# Altium PCB USB-C_Explorer.PcbDoc
Units mil, origin at the board's own origin, x right, y up, seen from the top; angles counter-clockwise.
Board outline 1725 x 1460 mil, 2 copper layers (Top Layer, Bottom Layer); 59 components, 39 nets, 240 pads, 140 vias.
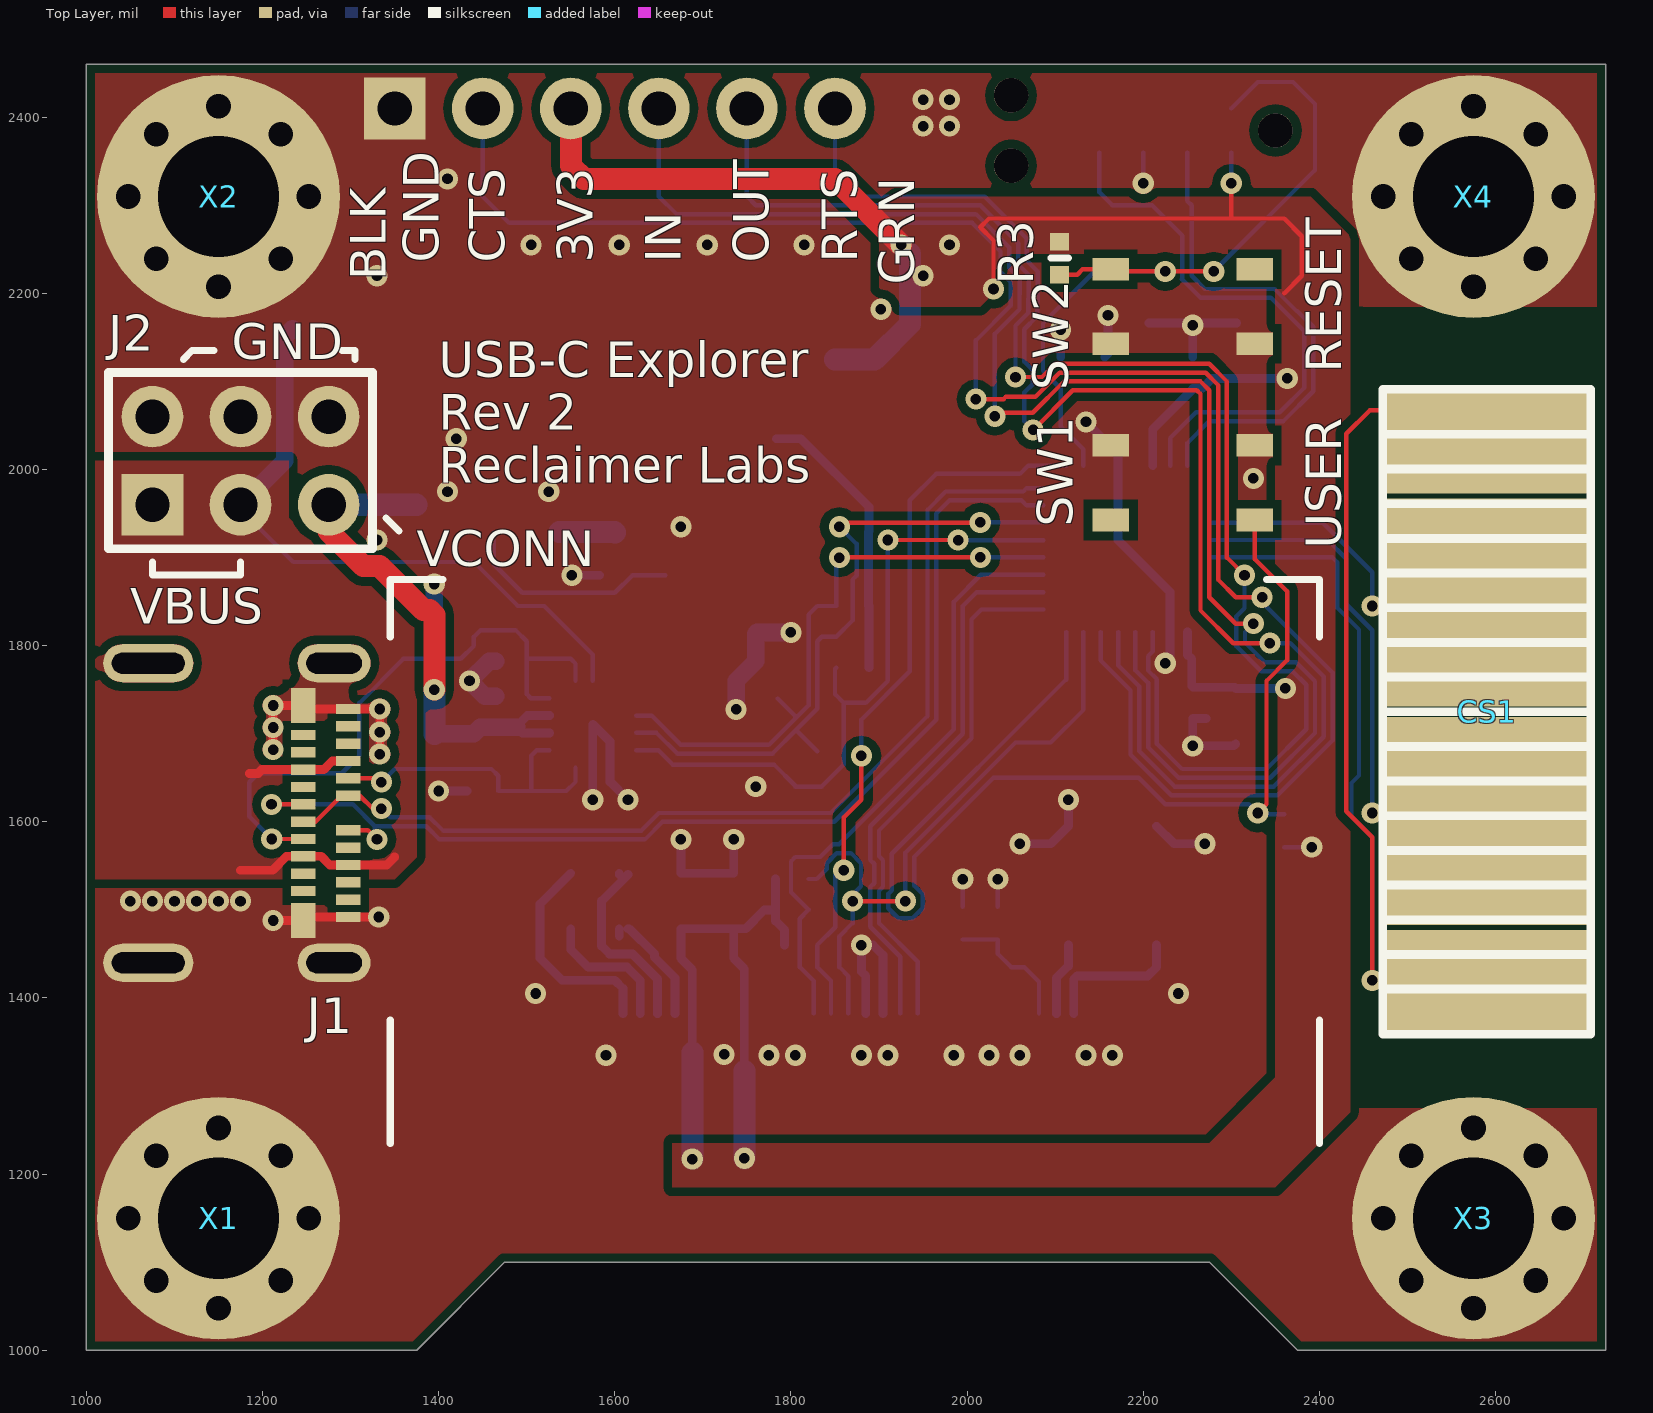
[diagram p0: Top Layer view]
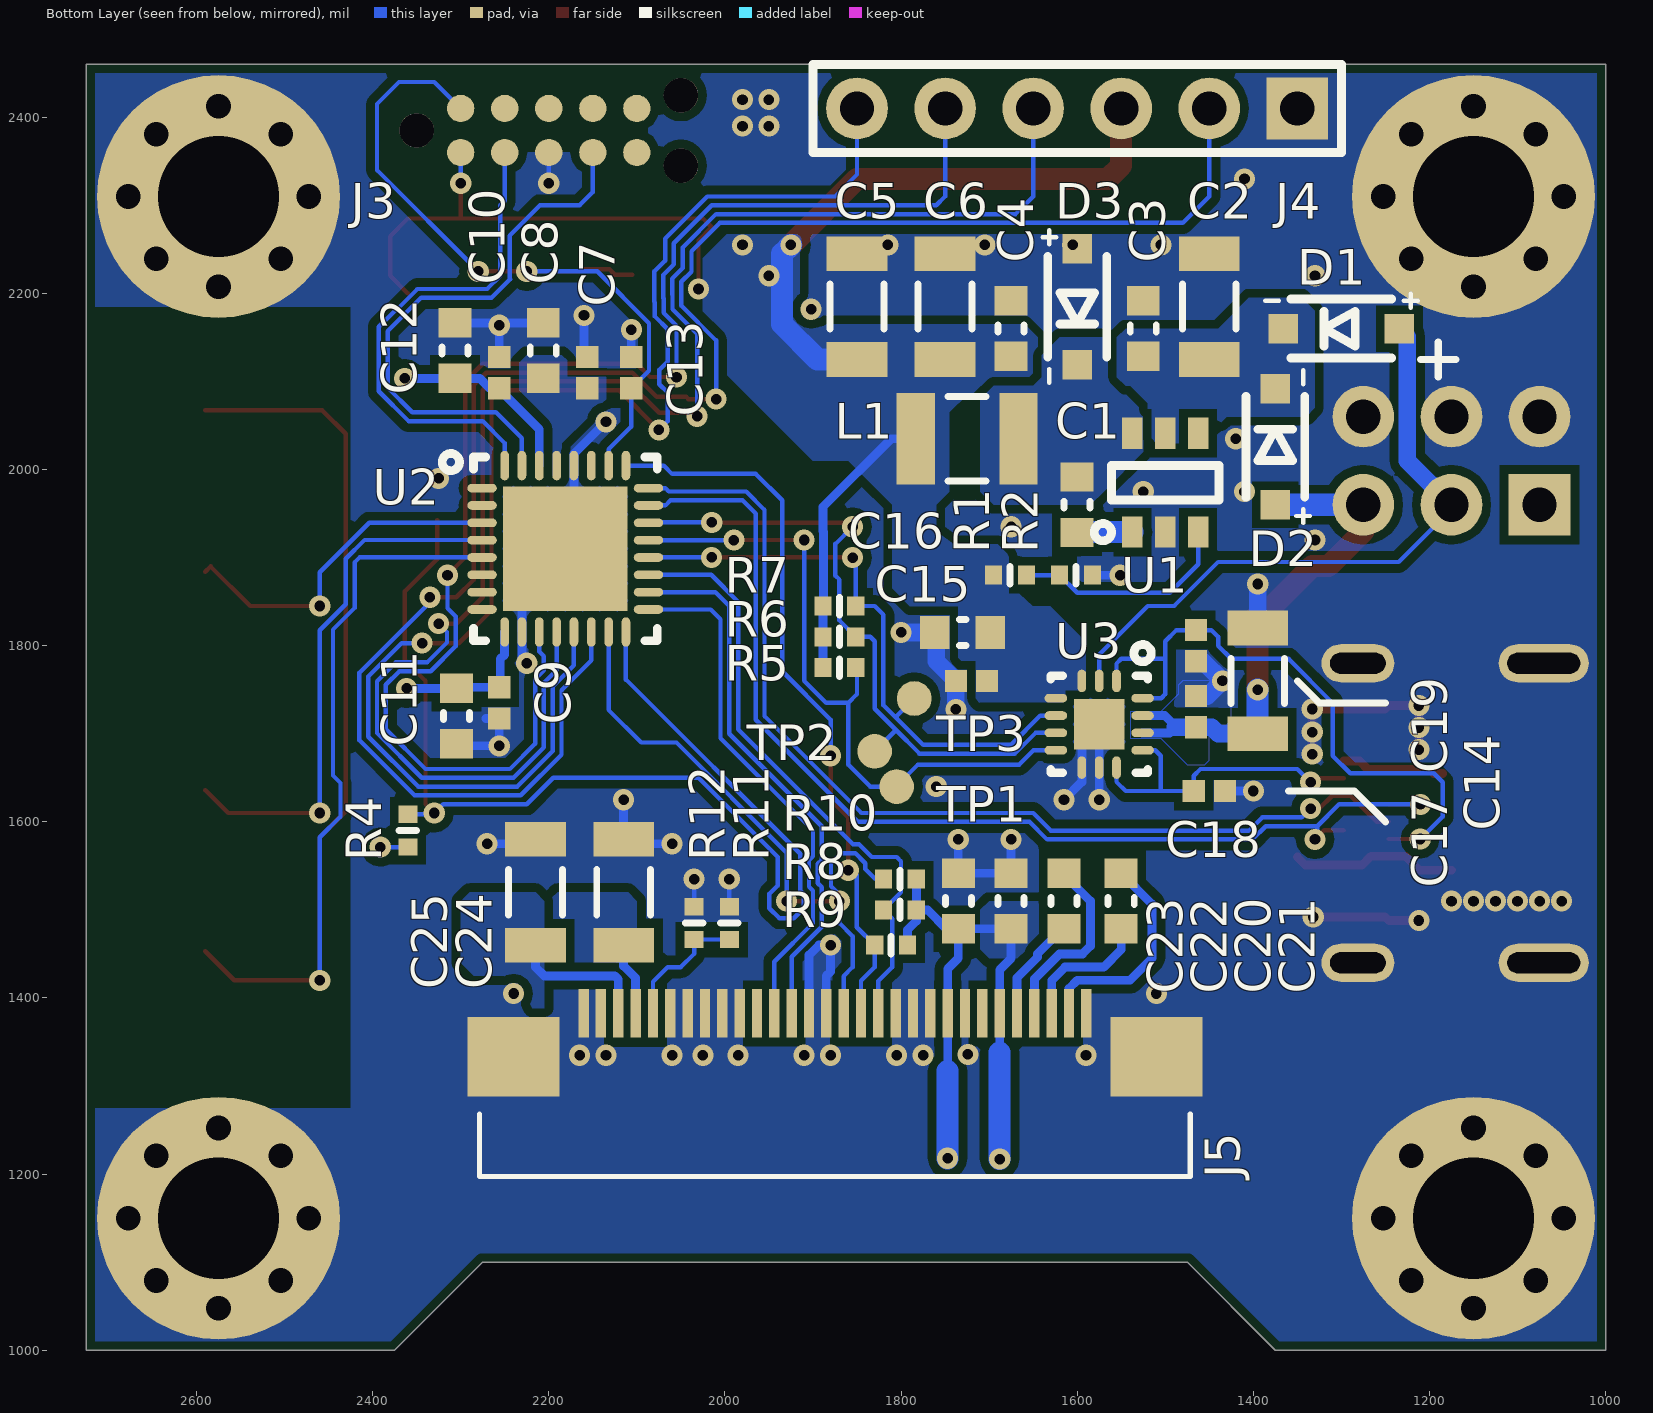
[diagram p1: Bottom Layer view, seen from below]
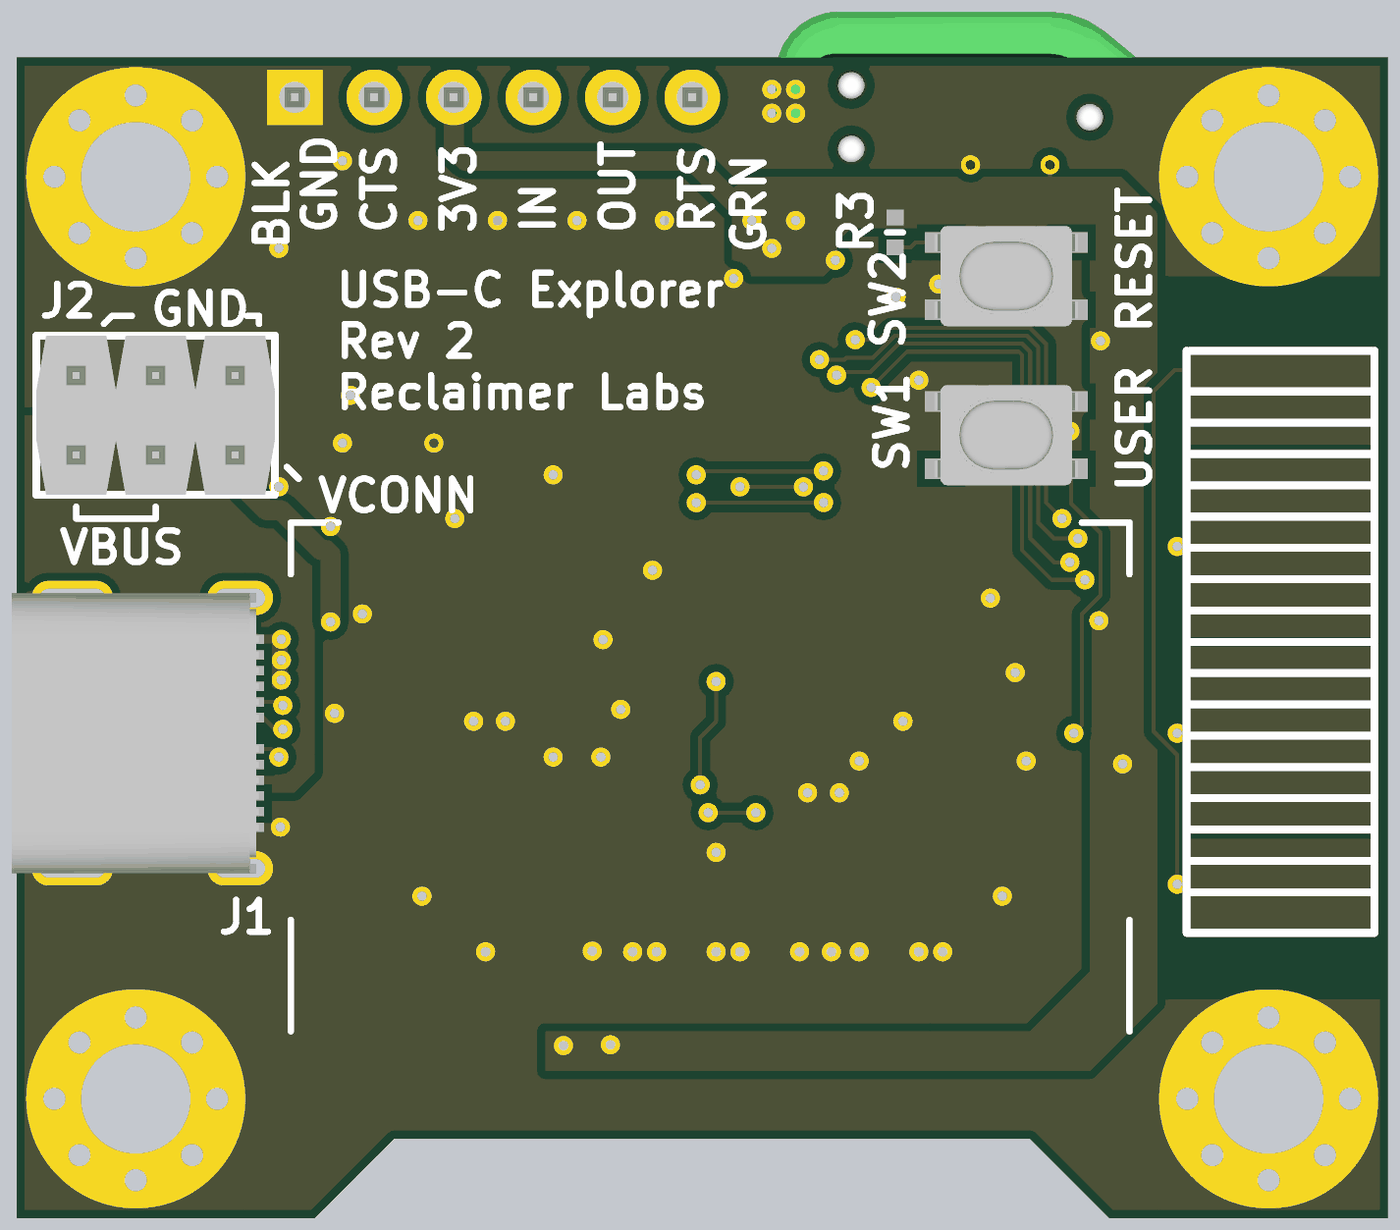
[diagram p2: 3D render of the assembled board from above, using the file's embedded part models]

## Layer stack, top to bottom
Top Solder: solder mask 0.4, Solder Resist, Dk 3.5
Top Layer: signal copper 1.4
Dielectric 1: dielectric 12.6, FR-4, Dk 4.8
Bottom Layer: signal copper 1.4
Bottom Solder: solder mask 0.4, Solder Resist, Dk 3.5

## Board outline
1000,1000 1000,2460 2725,2460 2725,1000 2375,1000 2275,1100 1475,1100 1375,1000

## Design rules (kind name [scope] priority, off if disabled: settings)
BoardOutlineClearance [All] p1: gap=10 ignorepadtopadclearanceinfootprint=FALSE
Clearance [All] p1: gap=5 ignorepadtopadclearanceinfootprint=FALSE except(10: Arc-Fill Arc-Poly Arc-Region Track-Fill Track-Poly Track-Region SMDPad-Fill SMDPad-Poly SMDPad-Region THPad-Fill THPad-Poly THPad-Region Via-Fill Via-Poly Via-Region Fill-Fill Fill-Poly Fill-Region Poly-Poly Poly-Region Region-Region)
DiffPairsRouting [All] p1: maxlimit=10 minlimit=5 mostfreqgap=5 toplayer_minwidth=5 toplayer_maxwidth=15 toplayer_prefwidth=5 bottomlayer_minwidth=5 bottomlayer_maxwidth=15 bottomlayer_prefwidth=5 maxuncoupledlength=500
Height [All] p1: minheight=0 maxheight=1200 prefheight=500
HoleSize [All] p1: absolutevalues=TRUE maxlimit=250 minlimit=12 maxpercent=80.000 minpercent=20.000
MinimumAnnularRing [All] p1: minimumring=6
MinimumSolderMaskSliver [All] p1: minsoldermaskwidth=3.94
PlaneConnect PlaneConnect_GND [InNet('GND')] p1: planeconnectstyle=Relief reliefexpansion=20 reliefentries=4 reliefconductorwidth=10 reliefairgap=10
PolygonConnect [All] p1: connectstyle=Direct reliefconductorwidth=10 reliefentries=4 polygonreliefangle="90 Angle" airgapwidth=10
RoutingVias [All] p1: holewidth=12 width=24 viastyle="Through Hole" minholewidth=12 minwidth=24 maxholewidth=24 maxwidth=48
SilkToSilkClearance [All] p1: silktosilkclearance=0
SilkToSolderMaskClearance [IsPad] p1: minsilkscreentomaskgap=0 clearancetoexposedcopper=TRUE
SolderMaskExpansion SolderMaskExpansion_Via [not IsVia] p1: expansion=1.97
SolderMaskExpansion SolderMaskExpansion_notVia [IsVia] p2: expansion=-100
Width [All] p1: maxlimit=100 minlimit=5 preferedwidth=5
23 further rules are at their usual default settings.

## Classes and differential pairs
component class USB-C: C1 C2 C3 C4 C5 C6 D1 D2 D3 J1 J2 L1 R1 R2 U1 U5 X1 X2 X3 X4
component class MCU: C7 C8 C9 C10 C11 C12 C13 C14 C15 C16 C17 C18 C19 CS1 J3 J4 R3 R4 R5 R6 R7 SW1 SW2 TP1 TP2 TP3 U2 U3
component class Display: C20 C21 C22 C23 C24 C25 J5 R8 R9 R10 R11 R12
differential pair USB: +USB_P -USB_N

## Components (designator, comment, footprint, x,y, rotation, side; value= is the part's Value field where it differs from the comment)
C1 "MF-CAP-0603-0.01uF" C0603 1600,1960 r90 bottom value=0.01uF
C2 "CL31B106KBHNNNE" C1206 1450,2185 r90 bottom value=10uF
C3 "MF-CAP-0603-1uF" C0603 1525,2160 r90 bottom value=1uF
C4 "MF-CAP-0603-1uF" C0603 1675,2160 r90 bottom value=1uF
C5 "MF-CAP-1206-10uF" C1206 1850,2185 r90 bottom value=10uF
C6 "MF-CAP-1206-10uF" C1206 1750,2185 r90 bottom value=10uF
C7 "MF-CAP-0402-0.1uF" C0402 2156.26,2110 r90 bottom value=0.1uF
C8 "MF-CAP-0603-1uF" C0603 2206.26,2135 r90 bottom value=1uF
C9 "MF-CAP-0402-0.1uF" C0402 2256.26,1735 r270 bottom value=0.1uF
C10 "MF-CAP-0402-0.1uF" C0402 2256.26,2110 r90 bottom value=0.1uF
C11 "MF-CAP-0603-1uF" C0603 2305,1720 r270 bottom value=1uF
C12 "MF-CAP-0603-1uF" C0603 2306.26,2135 r90 bottom value=1uF
C13 "MF-CAP-0402-0.1uF" C0402 2106.26,2110 r90 bottom value=0.1uF
C14 "MF-CAP-1206-10uF" C1206 1395,1760 r90 bottom value=10uF
C15 "MF-CAP-0402-0.1uF" C0402 1720,1760 r0 bottom value=0.1uF
C16 "MF-CAP-0603-1uF" C0603 1730,1815 r0 bottom value=1uF
C17 "MF-CAP-0402-0.1uF" C0402 1465,1725 r90 bottom value=0.1uF
C18 "CL05B471KB5NNNC" C0402 1450,1635 r180 bottom value=470pF
C19 "CL05B471KB5NNNC" C0402 1465,1800 r270 bottom value=470pF
C20 "MF-CAP-0603-1uF" C0603 1615,1510 r270 bottom value=1uF
C21 "MF-CAP-0603-1uF" C0603 1550,1510 r270 bottom value=1uF
C22 "MF-CAP-0603-1uF" C0603 1675,1510 r90 bottom value=1uF
C23 "MF-CAP-0603-1uF" C0603 1735,1510 r90 bottom value=1uF
C24 "MF-CAP-1206-10uF" C1206 2115,1520 r90 bottom value=10uF
C25 "MF-CAP-1206-10uF" C1206 2215,1520 r90 bottom value=10uF
CS1 "SLIDER" QTOUCH_SLIDER_19x6mm 2590,1725 r0 top
D1 "MF-DIO-SOD123-BAT42" SOD-123 1300,2160 r180 bottom value=BAT42
D2 "MF-DIO-SOD123-BAT42" SOD-123 1375,2025.94 r270 bottom value=BAT42
D3 "MF-DIO-SOD123-BAT42" SOD-123 1600,2185 r90 bottom value=BAT42
J1 "1054500101" 1054500101 1149,1610 r270 top
J2 "MF-CON-2.54mm-2x3" CONN_HEADER_02x03_2mm54_Straight 1175,2010 r0 top value="HDR 02x03 2mm54 Straight"
J3 "DNP" TC2050-IDC-NL 2200,2385 r180 bottom value=TDC2050-IDC
J4 "DNP" CONN_HEADER_01x06_2mm54_Straight 1600,2410 r0 bottom value=Serial
J5 "SFV30R-3STBE1HLF" SFV30R_Mirrored 1875,1280 r0 bottom value=ER-OLED0.96-1
L1 "MF-IND-1210-10uH" L1210 1725,2035 r0 bottom value=10uH
R1 "MF-RES-0402-680K" R0402 1676.3,1880 r180 bottom value=680k
R2 "MF-RES-0402-220K" R0402 1601.3,1880 r180 bottom value=220k
R3 "MF-RES-0402-10K" R0402 2105,2240 r270 top value=10k
R4 "MF-RES-0402-10K" R0402 2360,1590 r90 bottom value=10k
R5 "MF-RES-0402-2K" R0402 1870,1775 r180 bottom value=2k
R6 "MF-RES-0402-2K" R0402 1870,1810 r180 bottom value=2k
R7 "MF-RES-0402-10K" R0402 1870,1845 r180 bottom value=10k
R8 "MF-RES-0402-10K" R0402 1801.3,1500 r0 bottom value=10k
R9 "MF-RES-0402-10K" R0402 1811.3,1460 r0 bottom value=10k
R10 "MF-RES-0402-10K" R0402 1801.3,1535 r0 bottom value=10k
R11 "MF-RES-0402-750K" R0402 1995,1485 r90 bottom value=750k
R12 "MF-RES-0402-750K" R0402 2035,1485 r90 bottom value=750k
SW1 "MF-SW-TACT-4.2MM" TACT_4.2MM 2245,1985 r180 top value="Push Button"
SW2 "MF-SW-TACT-4.2MM" TACT_4.2MM 2245,2185 r0 top value="Push Button"
TP1 "TESTPOINT" TP_1mm 1805,1640 r90 bottom
TP2 "TESTPOINT" TP_1mm 1830,1680 r90 bottom
TP3 "TESTPOINT" TP_1mm 1785,1740 r90 bottom
U1 "RT8258GJ6" SOT23-6 1500,1985 r90 bottom
U2 "ATSAMD21E17A-MU" QFN32EP 2181.26,1910 r180 bottom value=ATSAMD21E
U3 "FUSB302BMPX" MLP14 1575,1710.79 r270 bottom
X1 "MTHOLE" MTHOLE_M3 1150,1150 r0 top
X2 "MTHOLE" MTHOLE_M3 1150,2310 r0 top
X3 "MTHOLE" MTHOLE_M3 2575,1150 r0 top
X4 "MTHOLE" MTHOLE_M3 2575,2310 r0 top

## Footprints (in the part's own frame and the unit in brackets; to place one, negate y for a bottom-side part, rotate by r counter-clockwise, add the part's x,y. Pads: shape width x height; smd on the part's side, far side on the other; paste and mask are expansions set on the pad)
1054500101 [mm]
  rect 0.3x0.7 smd: A1(-3,3.77) A2(-2.5,3.77) A3(-2,3.77) A4(-1.5,3.77) A5(-1,3.77) A6(-0.5,3.77) A7(0.5,3.77) A8(1,3.77) A9(1.5,3.77) A10(2,3.77) A11(2.5,3.77) A12(3,3.77) B2(2.25,2.47) B3(1.75,2.47) B4(1.25,2.47) B5(0.75,2.47) B6(0.25,2.47) B7(-0.25,2.47) B8(-0.75,2.47) B9(-1.25,2.47) B10(-1.75,2.47) B11(-2.25,2.47)
  rect 1x0.7 smd: B1(3.1,2.47) B12(-3.1,2.47)
  oval 1.1x2.1 hole 0.6 slot 1.6 at 90 deg: S1(-4.32,3.36) S2(4.32,3.36)
  oval 1.1x2.6 hole 0.6 slot 2.1 at 90 deg: S3(-4.32,-2) S4(4.32,-2)
  body extent -4.47,-3.94 4.47,3.96, height 3.16
C0402 [mm]
  rect 0.64x0.64 smd: 1(-0.45,0) 2(0.45,0)
  body extent -0.5,-0.25 0.5,0.25, height 0.55
C0603 [mm]
  rect 0.85x0.95 smd: 1(-0.8,0) 2(0.8,0)
  silkscreen extent -0.1,-0.38 0.1,0.38, body extent -0.8,-0.4 0.8,0.4, height 0.85
C1206 [mm]
  rect 1x1.75 smd: 1(-1.525,0) 2(1.525,0)
  silkscreen extent -0.65,-0.77 0.65,0.77, body extent -1.6,-0.8 1.6,0.8, height 1.6
CONN_HEADER_01x06_2mm54_Straight [mil]
  rect 70x70 hole 39: 1(-250,0)
  round 70 hole 39: 2(-150,0) 3(-50,0) 4(50,0) 5(150,0) 6(250,0)
  silkscreen extent -300,-50 300,50, body extent -300,-49 300,49, height 364
CONN_HEADER_02x03_2mm54_Straight [mil]
  rect 70x70 hole 39: 1(-100,-50)
  round 70 hole 39: 2(-100,50) 3(0,-50) 4(0,50) 5(100,-50) 6(100,50)
  silkscreen extent -150,-100 150,100, body extent -150,-100 150,100, height 364
L1210 [mm]
  rect 1.1x2.64 smd: 1(-1.48,0) 2(1.48,0)
  silkscreen extent -0.55,-1.22 0.55,1.22, body extent -1.6,-1.25 1.6,1.25, height 2.5
MLP14 [mm] "MLP, 14-Leads, Body 2.50x2.50mm, Pitch 0.50mm, Thermal Pad 1.45x1.45mm, IPC Medium Density"
  oval 0.65x0.25 smd: 1(-1.25,0.5) 2(-1.25,0) 3(-1.25,-0.5) 8(1.25,-0.5) 9(1.25,0) 10(1.25,0.5)
  oval 0.25x0.65 smd: 4(-0.75,-1.25) 5(-0.25,-1.25) 6(0.25,-1.25) 7(0.75,-1.25) 11(0.75,1.25) 12(0.25,1.25) 13(-0.25,1.25) 14(-0.75,1.25)
  rect 1.45x1.45 smd: 15(0,0)
  silkscreen extent -2.3,-1.4 1.4,1.5, body extent -1.25,-1.25 1.25,1.25, height 0.8
MTHOLE_M3 [mm]
  round 7 hole 3.5: 1(0,0)
QFN32EP [mm] "QFN, 32-Leads, Body 5.00x5.00mm, Pitch 0.50mm, Thermal Pad 3.60x3.60mm, IPC Medium Density"
  oval 0.85x0.25 smd: 1(-2.4,1.75) 2(-2.4,1.25) 3(-2.4,0.75) 4(-2.4,0.25) 5(-2.4,-0.25) 6(-2.4,-0.75) 7(-2.4,-1.25) 8(-2.4,-1.75) 17(2.4,-1.75) 18(2.4,-1.25) 19(2.4,-0.75) 20(2.4,-0.25) 21(2.4,0.25) 22(2.4,0.75) 23(2.4,1.25) 24(2.4,1.75)
  oval 0.25x0.85 smd: 9(-1.75,-2.4) 10(-1.25,-2.4) 11(-0.75,-2.4) 12(-0.25,-2.4) 13(0.25,-2.4) 14(0.75,-2.4) 15(1.25,-2.4) 16(1.75,-2.4) 25(1.75,2.4) 26(1.25,2.4) 27(0.75,2.4) 28(0.25,2.4) 29(-0.25,2.4) 30(-0.75,2.4) 31(-1.25,2.4) 32(-1.75,2.4)
  rect 3.6x3.6 smd: 33(0,0)
  silkscreen extent -3.55,-2.65 2.65,2.75, body extent -2.5,-2.5 2.5,2.5, height 1
QTOUCH_SLIDER_19x6mm [mm] "QTOUCH_SLIDER_19x6mm"
  rect 6x6 smd paste-100: 1(0,3.15) 2(0,-3.15)
  rect 6x3 smd paste-100: 3(0,-7.8) 3(0,7.8)
  silkscreen extent -3,-9.3 3,9.3
R0402 [mm]
  rect 0.5x0.55 smd: 1(-0.475,0) 2(0.475,0)
  silkscreen extent 0,-0.25 0,0.25, body extent -0.5,-0.25 0.5,0.25, height 0.35
SFV30R_Mirrored [mm] "30-pin FPC connector"
  rect 0.3x1.4 smd: 1(-7.25,-2.6) 2(-6.75,-2.6) 3(-6.25,-2.6) 4(-5.75,-2.6) 5(-5.25,-2.6) 6(-4.75,-2.6) 7(-4.25,-2.6) 8(-3.75,-2.6) 9(-3.25,-2.6) 10(-2.75,-2.6) 11(-2.25,-2.6) 12(-1.75,-2.6) 13(-1.25,-2.6) 14(-0.75,-2.6) 15(-0.25,-2.6) 16(0.25,-2.6) 17(0.75,-2.6) 18(1.25,-2.6) 19(1.75,-2.6) 20(2.25,-2.6) 21(2.75,-2.6) 22(3.25,-2.6) 23(3.75,-2.6) 24(4.25,-2.6) 25(4.75,-2.6) 26(5.25,-2.6) 27(5.75,-2.6) 28(6.25,-2.6) 29(6.75,-2.6) 30(7.25,-2.6)
  rect 2.65x2.3 smd: 31(9.275,-1.35) 32(-9.275,-1.35)
  silkscreen extent -10.25,0.3 10.25,2.1, body extent -10.25,-2.9 10.25,2, height 1.85
SOD-123 [mm] "SODFL, 2-Leads, Body 1.55x3.70mm, IPC Medium Density"
  rect 0.85x0.85 smd: 1(-1.675,0) 2(1.675,0)
  silkscreen extent -2.2,-0.85 2.2,1, body extent -1.43,-0.85 1.42,0.85, height 1.35
SOT23-6 [mm] "SOT23, 6-Leads, Body 2.90x2.79mm, Pitch 0.95mm, IPC Medium Density"
  rect 0.9x0.6 smd: 1(-1.425,0.95) 2(-1.425,0) 3(-1.425,-0.95) 4(1.425,-0.95) 5(1.425,0) 6(1.425,0.95)
  silkscreen extent -1.67,-1.55 0.5,2.05, body extent -1.5,-1.55 1.5,1.55, height 1.3
TACT_4.2MM [mm]
  rect 1.05x0.65 smd: 1(-2.075,1.075) 1(2.075,1.075) 2(-2.075,-1.075) 2(2.075,-1.075)
  body extent -2.29,-1.6 2.29,1.6, height 2.5
TC2050-IDC-NL [mil]
  round 31 smd paste-3937.01: 1(-100,-25) 2(-50,-25) 3(0,-25) 4(50,-25) 5(100,-25) 6(100,25) 7(50,25) 8(0,25) 9(-50,25) 10(-100,25)
  round 39 hole 39 unplated: ""(-150,0) ""(150,-40) ""(150,40)
  body extent -245,-133 245,133, height 1153
TP_1mm [mm] "Testpoint, 1mm diameter pad"
  round 1 smd paste-100: 1(0,0)

## Part data
C1: library part CAPACITOR_NP, Manufacturer 1=MacroFab, Voltage=50V, DisplayFootprint=C0603, Manufacturer Part Number 1=MF-CAP-0603-0.01uF, Material=X7R
C2: library part CAPACITOR_NP, Manufacturer 1=Samsung, Supplier Part Number 1=1276-6767-1-ND, Voltage=50V, DisplayFootprint=C1206, Manufacturer Part Number 1=CL31B106KBHNNNE, Material=X7R, Supplier 1=Digi-Key
C3 C4 C8 C11 C12 C16 C20 C21 C22 C23: library part CAPACITOR_NP, Manufacturer 1=MacroFab, Voltage=25V, DisplayFootprint=C0603, Manufacturer Part Number 1=MF-CAP-0603-1uF, Material=X7R
C5 C6 C7 C9 C10 C13 C14 C15 C17 C24 C25: library part CAPACITOR_NP, Manufacturer 1=MacroFab, Voltage=16V
  C5 C6 C14 C24 C25: DisplayFootprint=C1206, Manufacturer Part Number 1=MF-CAP-1206-10uF, Material=X5R
  C7 C9 C10 C13 C15 C17: DisplayFootprint=C0402, Manufacturer Part Number 1=MF-CAP-0402-0.1uF, Material=X7R
C18 C19: library part CAPACITOR_NP, Manufacturer 1=Samsung, Supplier Part Number 1=1276-1566-1-ND, Voltage=50V, DisplayFootprint=C0402, Manufacturer Part Number 1=CL05B471KB5NNNC, Material=X7R, Supplier 1=Digi-Key
CS1: library part QTOUCH_SLIDER
D1 D2: library part DIODE_SCHOTTKY, Manufacturer=MacroFab, Manufacturer Part Number 1=MF-DIO-SOD123-BAT42
D3: library part DIODE_SCHOTTKY, Manufacturer 1=MacroFab, Manufacturer Part Number 1=MF-DIO-SOD123-BAT42
J1: library part USB-C_RECPT, Manufacturer=Molex, Manufacturer Part Number 1=1054500101
J2: library part CONN_HEADER_02x03_2mm54_Straight, Manufacturer 1=MacroFab, Manufacturer Part Number 1=MF-CON-2.54mm-2x3
J3: library part TC2050-IDC, Manufacturer Part Number 1=DNP
J4: library part CONN_HEADER_01x06_2mm54_Straight, Manufacturer Part Number 1=DNP
J5: library part ER-OLED0.96-1, Manufacturer 1="Amphenol FCI", Manufacturer Part Number 1=SFV30R-3STBE1HLF
L1: library part INDUCTOR, Current=540mA, Manufacturer 1=MacroFab, DCR=133mOhm, FootprintDisplay=L1210, Manufacturer Part Number 1=MF-IND-1210-10uH
R1 R2 R3 R4 R5 R6 R7 R8 R9 R10 R11 R12: library part RESISTOR, Manufacturer 1=MacroFab, FootprintDisplay=R0402
  R1: Manufacturer Part Number 1=MF-RES-0402-680K
  R2: Manufacturer Part Number 1=MF-RES-0402-220K
  R3 R4 R7 R8 R9 R10: Manufacturer Part Number 1=MF-RES-0402-10K
  R5 R6: Manufacturer Part Number 1=MF-RES-0402-2K
  R11 R12: Manufacturer Part Number 1=MF-RES-0402-750K
SW1 SW2: library part SW_SPST_PB, Manufacturer 1=MacroFab, Manufacturer Part Number 1=MF-SW-TACT-4.2MM
U1: library part BUCK_RT8258GJ6, Manufacturer 1=Richtek, Supplier Part Number 1=1028-1044-1-ND, Manufacturer Part Number 1=RT8258GJ6, Supplier 1=Digi-Key
U2: library part ATSAMD21E, Manufacturer 1=Microchip, Manufacturer Part Number 1=ATSAMD21E17A-MU
U3: library part FUSB302B, Manufacturer 1=Fairchild/ON, Supplier Part Number 1=FUSB302BMPXCT-ND, Manufacturer Part Number 1=FUSB302BMPX, Supplier 1=Digi-Key

## Via types
v1: diameter 24, hole 12, Top Layer to Bottom Layer, 108 vias
v2: diameter 50, hole 28, Top Layer to Bottom Layer, 32 vias

## Nets (pads, with @x,y where several pads share a name; then routed paths per layer and width w, separated by ;. In a path a pad name is that pad's centre, name@x,y a point inside that pad or via, vN(x,y) a via of type N, cw(c..) or ccw(c..) an arc to the next point about the centre after c; other vN are vias at no path point)
DISPLAY_BIAS: J5.26 R11.1 R12.1 | length 152.1
  Bottom Layer w5: R11.1 R12.1 2035,1450 2050,1435 2065,1435 2081.69,1418.31 J5.26
DISPLAY_C1N: C20.2 J5.5 | length 127.6
  Bottom Layer w10: C20.2@1605,1470 C20.2@1605,1478.5 ; C20.2 1616.5,1478.5 1645,1450 1645,1446.21 1668.31,1422.91 J5.5
DISPLAY_C1P: C20.1 J5.4 | length 213.2
  Bottom Layer w10: C20.1@1605,1540 C20.1@1605,1541.5 ; C20.1@1615,1540 1585,1510 1585,1458.93 1593.93,1450 1620,1450 1648.62,1421.38 J5.4
DISPLAY_C2N: C21.2 J5.3 | length 154.5
  Bottom Layer w10: C21.2 1550,1455 1570,1435 1613.79,1435 1628.94,1419.85 J5.3
DISPLAY_C2P: C21.1 J5.2 | length 247.8
  Bottom Layer w10: C21.1 1515,1506.5 1515,1445 1540,1420 1600,1420 1609.25,1410.75 J5.2
DISPLAY_D/C_L: J5.15 R10.2 U2.15 | length 749.6
  Top Layer w5: v1(1870,1510) v1(1930,1510)
  Bottom Layer w5: R10.2 1829.14,1535 1840.5,1546.36 1840.5,1553.08 1851.92,1564.5 1868.08,1564.5 1879.5,1553.08 1879.5,1526.92 1865,1512.42 v1@1867.42,1510 ; v1@1861.54,1510 v1@1867.42,1510 ; J5.15 1865.16,1424.84 1855,1435 1855,1470 1870,1485 v1(1870,1510) v1@1867.42,1510 ; v1(1930,1510) 1930,1565 2055,1690 2095,1690 2132.05,1727.05 U2.15
DISPLAY_RESET_L: J5.14 R9.2 U2.25 | length 828.8
  Top Layer w5: v1(1860,1545) 1860,1605 1880,1625 v1(1880,1675)
  Bottom Layer w5: J5.14 1845.47,1419.53 1830,1435 R9.2 1850.27,1480.27 1850.27,1539.56 1855.71,1545 v1(1860,1545) ; v1(1880,1675) 1880,1715.86 1935,1770.86 1935,1965 1965,1995 2060,1995 2069.49,2004.49 U2.25
DISPLAY_VCC: C25.1 J5.28 | length 163.4
  Bottom Layer w10: J5.28 2121.06,1421.06 2125,1425 2205,1425 2215,1435 C25.1
DISPLAY_VCOMH: C24.1 J5.27 | length 83.2
  Bottom Layer w10: J5.27 2101.38,1422.59 2115,1436.21 C24.1
GND: C2.2 C3.2 C4.2 C5.2 C6.2 C7.2 C8.2 C9.2 C10.2 C11.2 C12.2 C13.2 C14.2 C15.2 C16.2 C17.2 C18.2 C19.2 C22.2 C23.2 C24.2 C25.2 D3.2 J1.A1 J1.A12 J1.B1 J1.B12 J1.S1 J1.S2 J1.S3 J1.S4 J2.2 J2.4 J2.6 J3.3 J4.1 J5.1 J5.8 J5.10 J5.11 J5.12 J5.16 J5.17 J5.21 J5.22 J5.23 J5.24 J5.25 J5.29 J5.30 J5.31 J5.32 R2.2 R11.2 R12.2 SW1.2 SW2.2 U1.2 U2.10 U2.28 U2.33 U3.8 U3.9 U3.15 X1.1 X2.1 X3.1 X4.1 | length 2055.5
  Top Layer w10: v1(1212.05,1487.95) J1.B1 1250.18,1491.89 J1.A12 v1(1331.89,1491.89) ; v1(1212.05,1682.05) v1(1212.05,1707.05) v1(1212.05,1732.05) J1.B12 1250.18,1728.11 J1.A1 v1(1333.11,1728.11) v1(1333.11,1701.89) v1(1333.11,1676.89)
  Bottom Layer w5: R11.2 v1(1995,1535) ; R12.2 v1(2035,1535) ; v1(2200,2325) J3.3
  Bottom Layer w10: v1(1400,1635) C18.2 ; v1(1551.3,1880) R2.2 ; v1(1575,1625) U3.9 U3.15 1594.68,1691.1 U3.8 1594.68,1645.32 v1(1615,1625) ; v1(1675,1580) C22.2 C23.2 v1(1735,1580) ; J5.16 1884.84,1425.16 1880,1430 v1(1880,1460) 1893.18,1460 1904.53,1448.65 J5.17 ; v1(2060,1575) 2094.96,1575 2115,1595.04 v1(2115,1625) ; C13.2 v1(2106.26,2158.74) ; v1(2135,2054.13) 2171.42,2017.72 U2.28 2171.42,1919.84 U2.33 2230.47,1860.79 U2.10 2230.47,1785.47 v1(2225,1780) ; C7.2 2160,2131.46 v1(2160,2175) ; C8.2 2253.5,2166.5 v1(2256.26,2163.74) ; C25.2@2215,1595.04 2235.04,1575 v1(2270,1575) ; C10.2 v1(2256.26,2163.74) ; 2271.55,1717.28 C9.2 v1(2256.26,1686.26) 2302.76,1686.26 C11.2 ; C12.2 2259.02,2166.5 v1(2256.26,2163.74)
  Bottom Layer w20: C14.2 v1(1395,1870) ; C17.2 1452.28,1742.72 v1(1435,1760) 1457.28,1782.28 C19.2 ; v1(1737.72,1727.72) C15.2 1760,1782.28 1760,1813.5 C16.2 v1(1800,1815)
  other v1: 1590,1335 1775,1335 1805,1335 1880,1335 1910,1335 1985,1335 2025,1335 2060,1335 2135,1335 2165,1335 1724.14,1335.86 1510,1405 2240,1405 1050,1510 1075,1510 1100,1510 1125,1510 1150,1510 1175,1510 1760,1640 1330,1920 1675,1935 1410,1975 1525,1975 2325,1990 1420,2035 1902.06,2182.06 1330,2220 1505,2255 1605,2255 1705,2255 1815,2255 1410,2330 1950,2390 1980,2390 1950,2420 1980,2420
  other v2: 1150,1047.64 2575,1047.64 1079.13,1079.13 1220.87,1079.13 2504.13,1079.13 2645.87,1079.13 1047.64,1150 1252.36,1150 2472.64,1150 2677.36,1150 1079.13,1220.87 1220.87,1220.87 2504.13,1220.87 2645.87,1220.87 1150,1252.36 2575,1252.36 1150,2207.64 2575,2207.64 1079.13,2239.13 1220.87,2239.13 2504.13,2239.13 2645.87,2239.13 1047.64,2310 1252.36,2310 2472.64,2310 2677.36,2310 1079.13,2380.87 1220.87,2380.87 2504.13,2380.87 2645.87,2380.87 1150,2412.36 2575,2412.36
I2C_SCL: R6.2 TP2.1 U2.22 U3.6 | length 748.2
  Top Layer w5: v1(1855,1935) 1859.5,1939.5 1918.08,1939.5 1918.23,1939.34 2014.34,1939.34 v1(2015,1940)
  Bottom Layer w5: U3.6 1647.34,1700.94 1670.86,1677.42 1779.14,1677.42 1806.72,1705 ; TP2.1 1806.72,1703.28 1806.72,1705 ; v1(1855,1935) 1874.5,1915.5 1874.5,1879.5 1870,1875 1870,1828.7 R6.2 1835,1810 1830,1805 1830,1728.28 1806.72,1705 ; v1(2015,1940) 2086.3,1940 U2.22
I2C_SDA: R5.2 TP1.1 U2.21 U3.7 | length 775.6
  Top Layer w5: v1(1910,1920) 1989.68,1920 v1(1989.84,1919.84)
  Bottom Layer w5: U3.7 1649.6,1681.26 1665.86,1665 1780.86,1665 1805,1640.86 TP1.1 1835,1640 1860,1665 1860,1735 ; R5.2 1850,1773.7 1850,1745 1860,1735 ; v1(1910,1920) 1910,1760 1885,1735 1860,1735 ; v1(1989.84,1919.84) U2.21
MCU_RESET_L: C13.1 J3.10 R3.2 SW2.1 U2.26 | length 878
  Top Layer w5: R3.2 2125,2221.3 2131.02,2227.32 2163.31,2227.32 2165.63,2225 v1(2225,2225) v1(2280,2225)
  Bottom Layer w5: U2.26 2132.05,2022.95 2106.26,2048.74 C13.1 2105.89,2092.28 2086.16,2112.01 2086.16,2166.22 2144.94,2225 v1(2225,2225) ; v1(2280,2225) 2395,2340 2395,2415 2370,2440 2330,2440 J3.10
MCU_SW0: R4.2 SW1.1 U2.16 | length 1343.8
  Top Layer w5: SW1.1@2326.69,1942.68 2326.69,1898.31 2363.37,1861.63 2363.37,1783.37 2340,1760 2340,1620 v1(2330,1610)
  Bottom Layer w5: U2.16 2112.36,1761.5 1914.5,1563.64 1914.5,1522.08 1910.5,1518.08 1910.5,1501.92 1921.92,1490.5 1938.08,1490.5 1949.5,1501.92 1949.5,1518.08 1940,1527.58 1940,1560 2030,1650 2195,1650 2225,1620 2320,1620 v1(2330,1610) 2331.3,1608.7 R4.2
MCU_SWCLK: J3.4 U2.31 | length 644.7
  Bottom Layer w5: J3.4 2150,2315 2165,2300 2210,2300 2244.5,2265.5 2244.5,2216.92 2243.79,2216.21 2265,2195 2345,2195 2383,2157 2383,2093 2355,2065 2260,2065 2230.47,2035.47 U2.31
MCU_SWDIO: J3.2 U2.32 | length 570.1
  Bottom Layer w5: J3.2 2250,2305 2255,2300 2255,2220 2270,2205 2349.14,2205 2374.14,2180 2375,2180 2393,2162 2393,2088.86 2359.14,2055 2275,2055 2250.16,2030.16 U2.32
MCU_UART_CTS_L: J4.2 U2.14 | length 2098.6
  Top Layer w5: v1(2010,2080) 2041.41,2080 2043.84,2082.43 2077.43,2082.43 2105,2110 2270.86,2110 2285,2095.86 2285,1875 2305,1855 v1(2335,1855)
  Bottom Layer w5: J4.2 1450,2310 1480,2280 2005.86,2280 2037.94,2247.92 2037.94,2224.64 2049.5,2213.08 2049.5,2186.13 2010,2146.63 v1(2010,2080) ; U2.14 2151.73,1783.26 2185.5,1749.5 2185.5,1676.22 2231.72,1630 2352.43,1630 2415,1692.57 2415,1769.14 2335,1849.14 v1(2335,1855)
MCU_UART_FROM_MCU: J4.5 U2.11 | length 1641.8
  Top Layer w5: v1(2055,2105) 2085,2105 2100,2120 2275,2120 2295,2100 2295,1900 v1(2315,1880)
  Bottom Layer w5: J4.5 1750,2310 1760,2300 2015,2300 2057.94,2257.06 2057.94,2232.92 2070,2220.86 2070,2194.64 2069.5,2194.14 2069.5,2177.84 2055,2163.34 v1(2055,2105) ; U2.11 2210.79,1793.36 2205.5,1788.08 2205.5,1771.92 2215.5,1761.92 2215.5,1688.64 2244.14,1660 2340,1660 2385,1705 2385,1755.57 2369.57,1771 2334,1771 2305.5,1799.5 2305.5,1833.08 2315,1842.58 v1(2315,1880)
MCU_UART_RTS_L: J4.6 U2.13 | length 1653.8
  Top Layer w5: v1(2075,2045) 2120,2090 2260.86,2090 2265,2085.86 2265,1840 2302.15,1802.85 v1(2343.87,1802.85)
  Bottom Layer w5: J4.6 1850,2335 1875,2310 2020,2310 2067.94,2262.06 2067.94,2237.06 2080,2225 2080,2190.5 2079.5,2190 2079.5,2173.7 2065,2159.2 2065,2122.58 2074.5,2113.08 2074.5,2096.92 2065,2087.42 2065,2055 v1(2075,2045) ; U2.13 2171.42,1777.72 2195.5,1753.64 2195.5,1680.36 2235.86,1640 2348.28,1640 2405,1696.72 2405,1765 2367.15,1802.85 v1(2343.87,1802.85)
MCU_UART_TO_MCU: J4.4 U2.12 | length 1835.4
  Top Layer w5: v1(2031.51,2060.5) 2035.51,2064.5 2074.5,2064.5 2110,2100 2265,2100 2275,2090 2275,1855 2305,1825 v1(2325,1825)
  Bottom Layer w5: J4.4 1650,2310 1670,2290 2010,2290 2047.94,2252.06 2047.94,2228.78 2060,2216.72 2060,2198.78 2059.5,2198.28 2059.5,2181.98 2031.51,2154 v1(2031.51,2060.5) ; U2.12 2191.1,1772.18 2205.5,1757.78 2205.5,1684.5 2240,1650 2344.14,1650 2395,1700.86 2395,1759.71 2373.72,1781 2338.15,1781 2315.5,1803.64 2315.5,1815.5 v1(2325,1825)
MCU_VDDCORE: C7.1 C8.1 U2.29
SPI_CS_L: J5.13 R8.2 U2.19 | length 698.1
  Bottom Layer w5: J5.13 1825.79,1419.21 1810,1435 1810,1490 R8.2 1800,1520 1800,1555 1805,1560 1833.28,1560 1847.78,1574.5 1854.5,1574.5 1985,1705 1985,1850 2015.47,1880.47 U2.19
SPI_MOSI: J5.19 U2.17 | length 599.4
  Bottom Layer w5: J5.19 1943.9,1441.1 1900,1485 1900,1521.72 1904.5,1526.22 1904.5,1556.36 1900,1560.86 1900,1590 2005,1695 2005,1830 2016.1,1841.1 U2.17
SPI_SCK: J5.18 U2.18 | length 622.3
  Bottom Layer w5: J5.18 1924.21,1446.65 1890,1480.86 1890,1525.86 1894.5,1530.36 1894.5,1552.22 1890,1556.72 1890,1595 1995,1700 1995,1845 2010.79,1860.79 U2.18
USB_N: J1.A7 J1.B7 U2.23 | length 1281.1
  Top Layer w5: v1(1210.16,1619.84) J1.B7 ; J1.A7 1319.68,1590.32 v1(1330,1580)
  Bottom Layer w5: v1(1210.16,1619.84) 1302.58,1619.84 1327.42,1595 ; v1(1330,1580) 1327.42,1582.58 1327.42,1595 ; U2.23 2067.54,1959.21 2061.75,1965 1980,1965 1965,1950 1965,1715.86 1849.14,1600 1654.14,1600 1634.14,1580 1400.86,1580 1385.86,1595 1327.42,1595
USB_P: J1.A6 J1.B6 U2.24 | length 1167.4
  Top Layer w5: J1.B6 1260.16,1600.16 1289.68,1629.68 J1.A6 1310.32,1629.68 1325,1615 v1(1335,1615)
  Bottom Layer w5: v1(1335,1615) 1345,1605 1390,1605 1405,1590 1630,1590 1650,1610 1845,1610 1955,1720 1955,1954.14 1975.86,1975 2063.64,1975 2067.54,1978.9 U2.24
USBC_CC1: C18.1 J1.A5 U3.10 U3.11 | length 370.3
  Top Layer w5: J1.A5 1330.63,1649.37 v1(1335,1645)
  Bottom Layer w5: v1(1335,1645) 1350,1660 1460,1660 1467.72,1652.28 C18.1 1505,1635 ; U3.11 1511.26,1681.26 1505,1675 1505,1635 ; U3.10 1555.32,1645.32 1545,1635 1505,1635
USBC_CC2: C19.1 J1.B5 U3.1 U3.14 | length 708.6
  Top Layer w5: v1(1210.47,1580.47) J1.B5
  Bottom Layer w5: v1(1210.47,1580.47) 1185,1605.94 1185,1645 1195,1655 1290,1655 1310,1675 1310,1735 1360,1785 1425,1785 1440,1800 1440,1810 1447.72,1817.72 C19.1 1487.28,1817.72 1500,1805 1500,1785 ; U3.14 1504.68,1740.32 1500,1745 1500,1785 ; U3.1 1555.32,1779.68 1550,1785 1500,1785
USBC_PD_INT_L: R7.2 TP3.1 U2.20 U3.5 | length 689.9
  Top Layer w5: v1(1855,1900) 1855.34,1900.34 2004.66,1900.34 2010,1895 v1(2015.16,1900.16)
  Bottom Layer w5: U3.5 1641.79,1720.63 1675,1687.42 1775,1687.42 1805,1717.42 ; TP3.1 1805,1720 1805,1717.42 ; v1(1855,1900) 1851.3,1896.3 R7.2 1830,1845 1820,1835 1820,1732.42 1805,1717.42 ; v1(2015.16,1900.16) U2.20
V3P3: C4.1 C5.1 C6.1 C9.1 C10.1 C11.1 C12.1 C15.1 C16.1 C22.1 C23.1 J3.1 J4.3 J5.6 J5.9 L1.2 R1.1 R3.1 R4.1 R5.1 R6.1 R7.1 R8.1 R9.1 R10.1 U2.9 U2.30 U3.3 U3.4 | length 2743.9
  Top Layer w5: v1(2030,2205) 2030,2260 2015,2275 2025,2285 2300,2285 ; v1(2300,2325) 2300,2285 ; 2360,2200 2380,2220 2380,2265 2360,2285 2300,2285
  Top Layer w25: J4.3 1550,2345 1565,2330 1850,2330 v1(1925,2255)
  Bottom Layer w5: v1(2300,2325) J3.1 ; R4.1 v1(2391.3,1571.3)
  Bottom Layer w10: 1687.99,1337.99 J5.6 1687.99,1432.01 1675,1445 C22.1 C23.1 ; 1747.05,1317.05 J5.9 1747.05,1432.95 1735,1445 C23.1 ; R10.1 R8.1 ; L1.2 1811.11,2035 1888.7,1957.41 1888.7,1929.81 1888,1929.11 1888,1845.7 R7.1 R6.1 R5.1 ; R9.1 1792.6,1477.4 1782.6,1487.4 R8.1 ; U2.30 2210.79,2045.79 2256.26,2091.26 C10.1 2267.28,2092.28 2278.5,2103.5 C12.1 v1(2363.5,2103.5) ; U2.9 2250.16,1789.84 2255,1785 2255,1753.98 C9.1@2256.26,1753.98 ; C9.1 2303.78,1752.72 C11.1 v1(2361.5,1751.5) ; C23.1 1748.5,1478.5 1770,1500 R8.1
  Bottom Layer w25: v1(1687.99,1217.01) 1687.99,1337.99 ; v1(1747.05,1217.95) 1747.05,1317.05 ; C5.1 1894.96,2124.96 1935,2165 1935,2245 v1(1925,2255)
  other v1: 1950,2220 1980,2255
V3P3_FB: R1.2 R2.1 U1.3 | length 253.2
  Bottom Layer w5: U1.3 1462.6,1892.4 1495,1860 1600,1860 R2.1 R1.2
V3P3_LX: C1.1 U1.1 | length 62.8
  Bottom Layer w25: U1.1 1599.61,1928.9 C1.1
V3P3_PHASE: C1.2 D3.1 L1.1 U1.6
V3P3_VIN: C2.1 C3.1 D1.1 D2.1 U1.5
VBUS: D1.2 J1.A4 J1.A9 J1.B4 J1.B9 J2.1 J2.3 U3.2 | length 1035.4
  Top Layer w10: 1175,1545 1211.45,1545 1227.24,1560.79 J1.B4 1266.63,1560.79 1276.47,1550.94 J1.A9 1340.94,1550.94 1350,1560 ; 1185,1655 1195,1655 1199.21,1659.21 J1.B9 1269.49,1659.21 1279.33,1669.06 J1.A4
  Bottom Layer w5: J2.3 1175,1955 1235,1895 1440,1895 1490,1845 1520,1845 1575,1790 U3.2
  Bottom Layer w20: J2.3 1225,2010 1225,2150.94 D1.2
VCONN_IN: C14.1 C17.1 D2.2 J2.5 U3.12 U3.13 | length 604.9
  Top Layer w25: J2.5 1275,1930 1314.5,1890.5 1332.78,1890.5 1382.78,1840.5 1389.5,1840.5 1395,1835 v1(1395,1750)
  Bottom Layer w10: 1487.28,1707.28 1500.63,1720.63 U3.13 ; 1488.66,1707.28 1495,1700.94 U3.12
  Bottom Layer w20: C14.1 1439.96,1699.96 1447.28,1707.28 C17.1 1487.28,1707.28 1488.66,1707.28
  Bottom Layer w25: J2.5 D2.2 ; C14.1 v1(1395,1750)
Y0: CS1.1 U2.3 | length 397
  Top Layer w5: v1(2460,1845) 2539.02,1845 2584.02,1890 CS1.1@2590,1884.02
  Bottom Layer w5: U2.3 2403.76,1939.53 2460,1883.28 v1(2460,1845)
Y1: CS1.2 U2.4 | length 605.3
  Top Layer w5: v1(2460,1610) 2564.02,1610 CS1.2@2590,1635.98
  Bottom Layer w5: U2.4 2275.91,1920 2409.14,1920 2430.5,1898.64 2430.5,1846.92 2460,1817.42 v1(2460,1610)
Y2: CS1.3 U2.5 | length 1591.9
  Top Layer w5: CS1.3@2590,1452.91 2557.09,1420 v1(2460,1420) 2460,1582.42 2430.5,1611.92 2430.5,2040.5 2457.09,2067.09 CS1.3@2590,2067.09
  Bottom Layer w5: U2.5 2414.84,1900.16 2420.5,1894.5 2420.5,1842.78 2445,1818.28 2445,1652.58 2436.48,1644.06 2436.48,1605.94 2460,1582.42 v1(2460,1420)
pads on no net: J1.A2 J1.A3 J1.A8 J1.A10 J1.A11 J1.B2 J1.B3 J1.B8 J1.B10 J1.B11 J3. J3.5 J3.6 J3.7 J3.8 J3.9 J5.7 J5.20 U1.4 U2.1 U2.2 U2.6 U2.7 U2.8 U2.27

## Polygon pours and split planes (outlines as drawn)
DISPLAY_VCC on Bottom Layer "DISPLAY_VCC_L02_P000" (solid, remove dead copper, pour order 0): 2225,1280 2230,1285 2230,1405 2250,1425 2285,1425 2300,1440 2300,1510 2290,1520 2215,1520 2205,1510 2205,1285 2210,1280
DISPLAY_VCOMH on Bottom Layer "DISPLAY_VCOMH_L02_P002" (solid, remove dead copper, pour order 2): 2195,1280 2200,1285 2200,1510 2190,1520 2110,1520 2100,1510 2100,1455 2115,1440 2160,1440 2175,1425 2175,1285 2180,1280
V3P3 on Bottom Layer "V3P3_L02_P006" (solid, remove dead copper, pour order 6): 1620,1280 1625,1285 1625,1420 1650,1445 1700,1445 1710,1455 1710,1500 1700,1510 1605,1510 1600,1505 1600,1280
V3P3_VIN on Bottom Layer "V3P3_VIN_L02_P008" (solid, remove dead copper, pour order 8): 1330,2070 1340,2060 1430,2060 1460,2030 1510,2030 1520,2040 1520,2075 1540,2095 1545,2095 1555,2105 1555,2150 1545,2160 1440,2160 1405,2195 1345,2195 1330,2180
V3P3_PHASE on Bottom Layer "V3P3_PHASE_L02_P010" (solid, remove dead copper, pour order 10): 1525,2045 1525,2020 1570,1975 1585,1960 1695,1960 1710,1975 1710,2080 1695,2095 1650,2095 1640,2105 1640,2130 1620,2150 1565,2150 1560,2145 1560,2105 1525,2070
V3P3 on Bottom Layer "V3P3_L02_P012" (solid, remove dead copper, pour order 12): 1745,1975 1760,1960 1810,1960 1900,2050 1900,2150 1885,2165 1660,2165 1645,2150 1645,2110 1655,2100 1700,2100 1715,2085 1725,2085 1745,2065
V3P3 on Bottom Layer "V3P3_L02_P018" (solid, remove dead copper, pour order 18): 1540,1725 1540,1695 1505,1695 1475,1665 1455,1665 1450,1670 1450,1705 1445,1710 1430,1710 1425,1715 1425,1755 1430,1760 1480,1760 1485,1755 1485,1745 1505,1725
MCU_VDDCORE on Bottom Layer "MCU_VDDCORE_L02_P020" (solid, remove dead copper, pour order 20): 2195,1985 2200,1990 2200,2055 2235,2090 2235,2120 2225,2130 2185,2130 2175,2120 2175,2115 2170,2110 2140,2110 2135,2105 2135,2080 2185,2030 2185,1990 2190,1985
V3P3 on Bottom Layer "V3P3_L02_P026" (solid, remove dead copper, pour order 26): 1590,1804.42 1630.58,1845 1650.59,1845 1675,1868.06 1675,1900 1690,1915 1740,1915 1760,1930 1760,1960 1775,1985 1810,1985 1810,1865 1790,1845 1735,1845 1735,1735 1590,1736.01
GND on Bottom Layer "GND_L02_P014" (solid, remove dead copper, pour order 14): 1345,2205 1330,2220 1330,2275 1345,2290 1890,2290 1905,2275 1905,2185 1890,2170 1440,2170 1405,2205
V3P3 on Bottom Layer "V3P3_L02_P024" (solid, remove dead copper, pour order 24): 1900,2010 2025,2135 2025,2240 1995,2270 1910,2270 1910,2175 1800,2175 1800,2010
GND on Bottom Layer "GND_L02_P032" (solid, remove dead copper, pour order 32): 1000,1000 1000,2500 2800,2500 2800,1000
VBUS on Top Layer "VBUS_L01_P004" (solid, remove dead copper, pour order 4): 1000,2010 1230,2010 1230,1945 1290,1885 1325,1885 1375,1835 1375,1560 1350,1535 1000,1535
V3P3 on Top Layer "V3P3_L01_P022" (solid, remove dead copper, pour order 22): 1665,1235 2275,1235 2350,1310 2350,2235 2340,2245 2050,2245 2030,2225 2030,2200 2015,2185 1920,2185 1900,2200 1900,2295 1920,2310 2390,2310 2435,2265 2435,1270 2350,1185 1665,1185
GND on Top Layer "GND_L01_P034" (solid, remove dead copper, pour order 34): 1000,1000 1000,2500 2800,2500 2800,1000

## Other copper
Top Layer:
  pour cut-out: 2725,1275 2725,2185 2450,2185 2450,1275
Bottom Layer:
  pour cut-out: 1720,2070 1735,2070 1735,1965 1720,1965
  pour cut-out: 2725,1275 2425,1275 2425,2185 2725,2185
  pour cut-out: 2100,2360 2300,2360 2300,2410 2100,2410

## Silkscreen, mask and mechanical layers (free items; w line width, h text height)
Top Overlay:
  lines w8: 1075,1895 1075,1880 1175,1880 1175,1895 ; 1110,2125 1120,2135 1145,2135 ; 1290,2135 1305,2135 1305,2125 ; 1340,1945 1355,1930 ; 1345,1235 1345,1375 ; 1345,1810 1345,1875 1405,1875 ; 2340,1875 2400,1875 2400,1810 ; 2400,1235 2400,1375
  text "GND" at 1400,2235 h40 r90
  text "CTS" at 1475,2235 h40 r90
  text "3V3" at 1575,2235 h40 r90
  text "IN" at 1675,2235 h40 r90
  text "OUT" at 1775,2235 h40 r90
  text "RTS" at 1875,2235 h40 r90
  text "BLK" at 1340,2215 h40 r90
  text "GRN" at 1940,2210 h40 r90
  text "GND" at 1165,2125 h40
  text "RESET" at 2425,2110 h40 r90
  text "USB-C Explorer / Rev 2 / Reclaimer Labs" at 1400,1985 h40
  text "USER" at 2425,1910 h40 r90
  text "VCONN" at 1375,1890 h40
  text "VBUS" at 1050,1825 h40
Bottom Overlay:
  lines w8: 1170,2125 1210,2125 ; 1190,2105 1190,2145 ; 1250,1600 1285,1635 1360,1635 ; 1250,1735 1325,1735 1350,1760
Mechanical 1:
  lines w10: 1000,1000 1000,2460 2725,2460 2725,1000 2375,1000 2275,1100 1475,1100 1375,1000 1000,1000 ; 1040.73,1428.11 cw(c1040.73,1439.92) 1040.73,1451.73 1099.79,1451.73 cw(c1099.79,1439.92) 1099.79,1428.11 1040.73,1428.11 ; 1040.73,1768.27 cw(c1040.73,1780.08) 1040.73,1791.89 1099.79,1791.89 cw(c1099.79,1780.08) 1099.79,1768.27 1040.73,1768.27 ; 1261.6,1427.72 cw(c1261.6,1439.53) 1261.6,1451.34 1300.97,1451.34 cw(c1300.97,1439.53) 1300.97,1427.72 1261.6,1427.72 ; 1261.6,1768.27 cw(c1261.6,1780.08) 1261.6,1791.89 1300.97,1791.89 cw(c1300.97,1780.08) 1300.97,1768.27 1261.6,1768.27